# Altium PCB SPE_To_Ethernet.PcbDoc (part 2 of 3)
Units mm, origin at the board's own origin, x right, y up, seen from the top; angles counter-clockwise.
Board outline 152.4 x 101.6 mm, 4 copper layers (Top Layer, GND, Power, Bottom Layer), stack 1.526 mm thick; 154 components, 131 nets, 628 pads, 232 vias.
Unrouted connection lines stored in the file: 149.
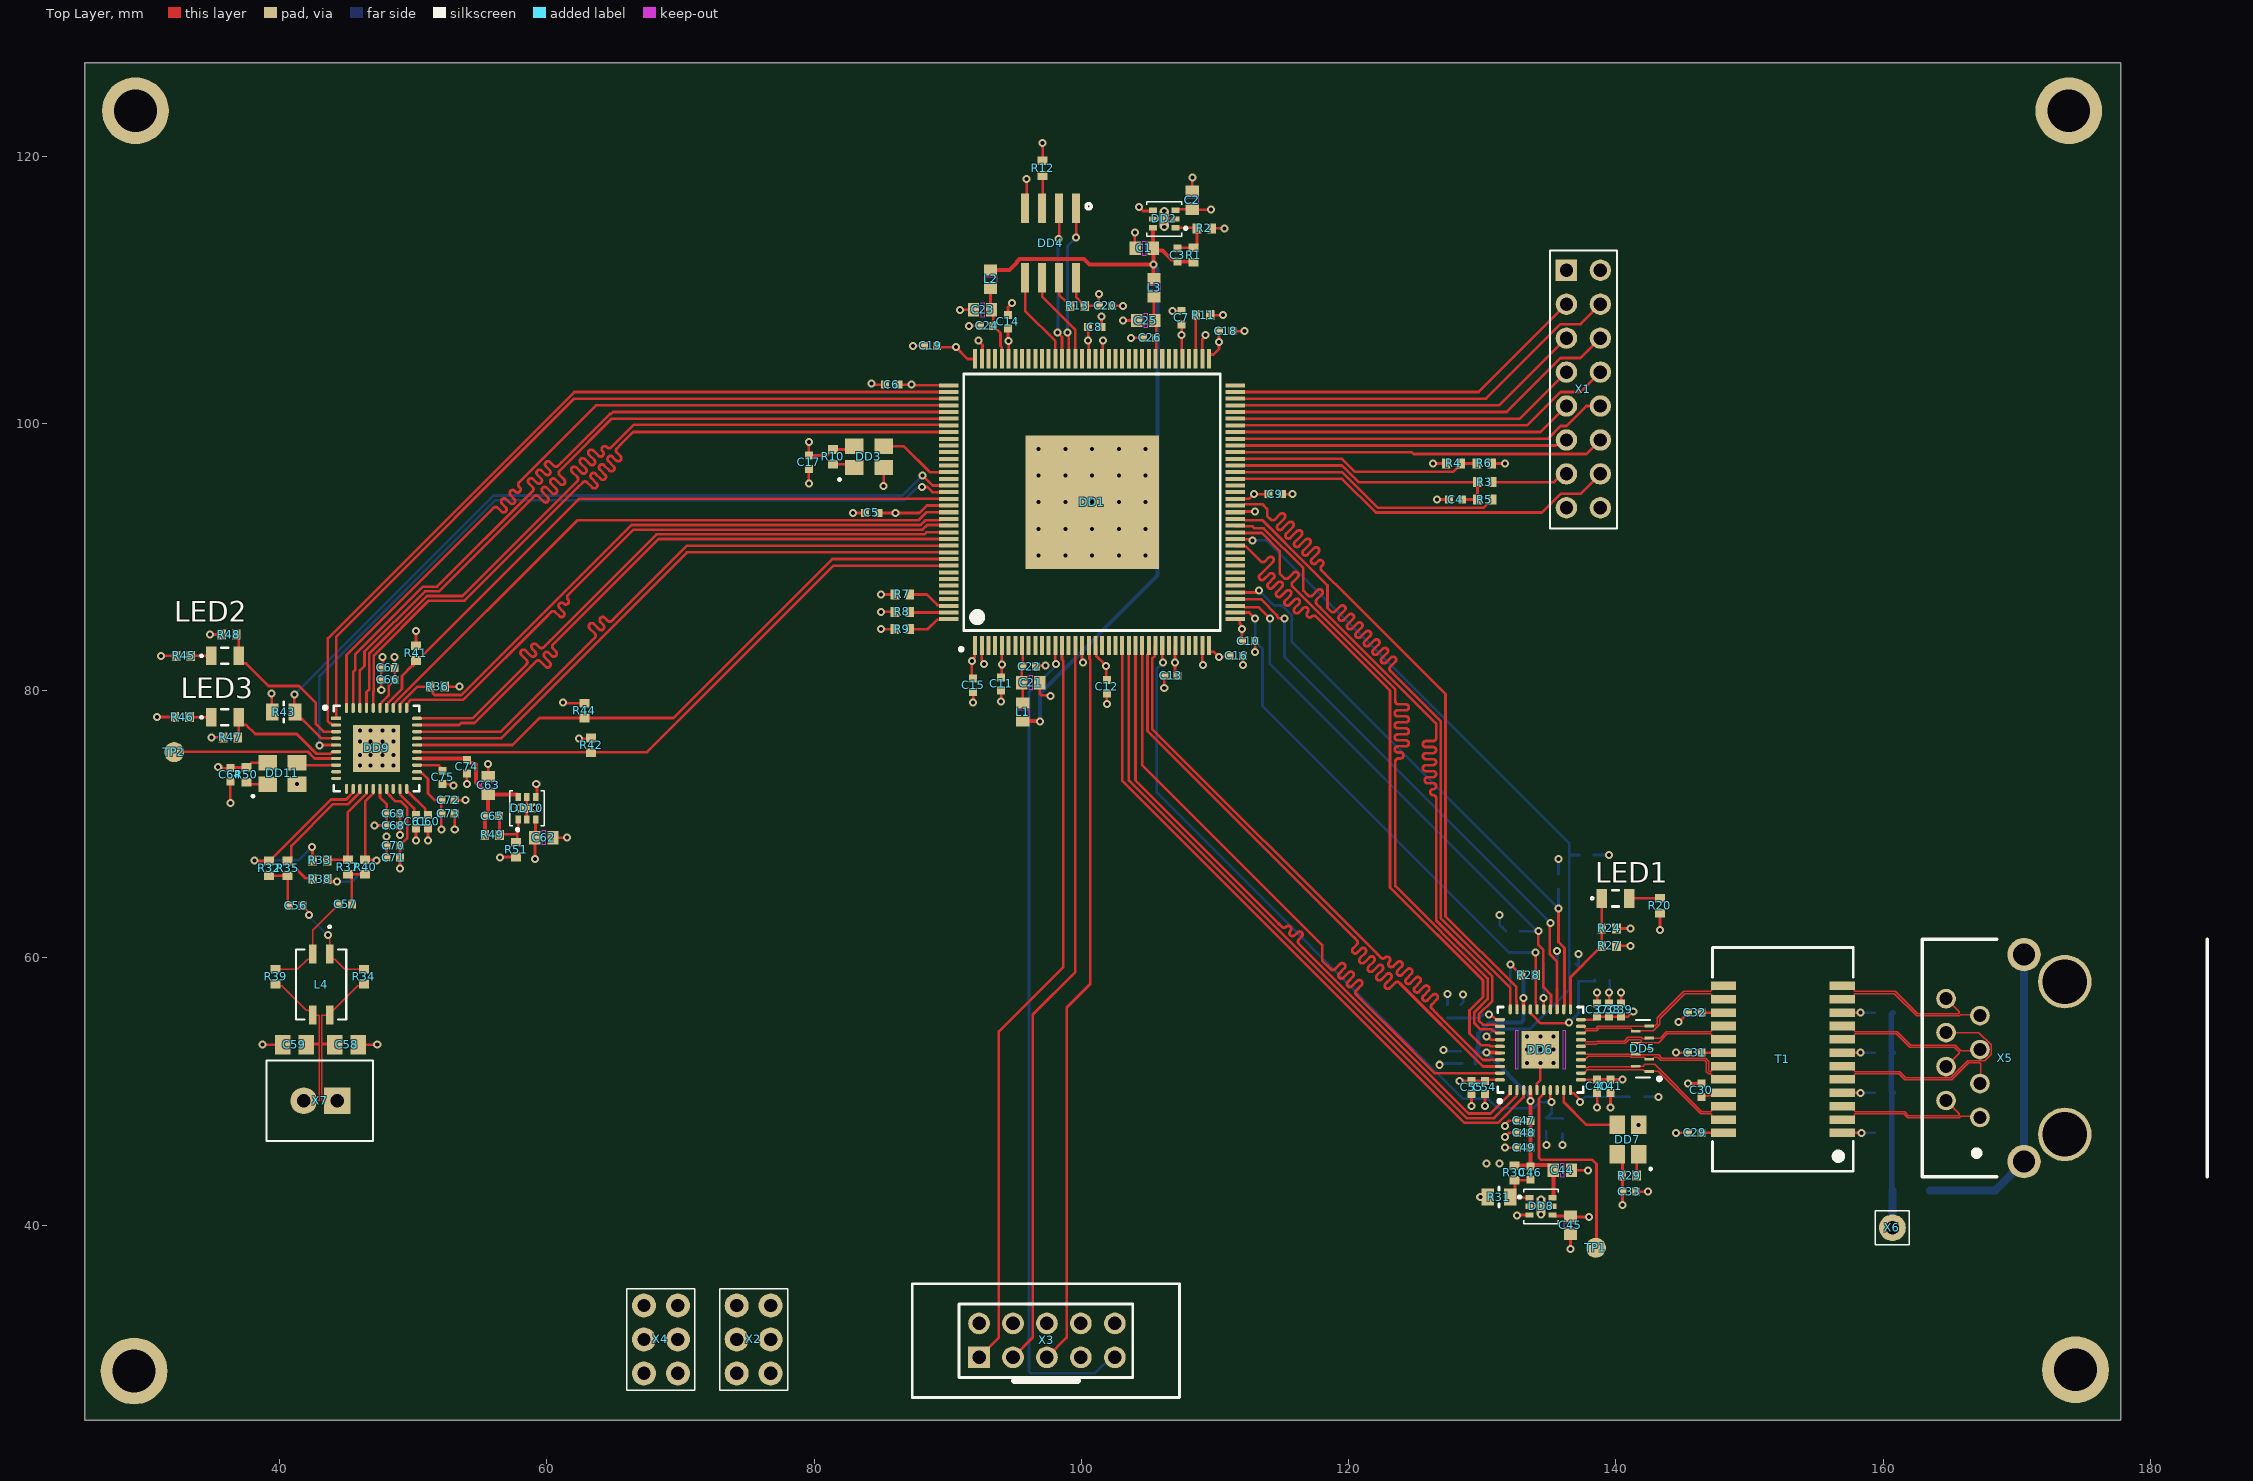
[diagram p0: Top Layer view]

## Via types
v1: diameter 0.6, hole 0.3, Top Layer to Bottom Layer, tented both sides, 207 vias
v2: diameter 0.7, hole 0.3, Top Layer to Bottom Layer, tented both sides, 25 vias

## Nets (pads, with @x,y where several pads share a name; then routed paths per layer and width w, separated by ;. In a path a pad name is that pad's centre, name@x,y a point inside that pad or via, vN(x,y) a via of type N, cw(c..) or ccw(c..) an arc to the next point about the centre after c; other vN are vias at no path point) (continued)
ETH_LINK_ST: (continued)
  Top Layer w0.2: DD1.38@111.525,85.85 112.55,85.85 v1(113,85.4) ; v1(134,60.4) R28.2@134,58.7 134,56.514 134.1,56.414 DD6.26@134.1,56.15
  Bottom Layer w0.2: v1(113,85.4) 113,83.678 113.55,83.128 113.55,78.85 132,60.4 v1(134,60.4)
ETH_MDC: DD1.40 DD6.23 | length 42.1
  Top Layer w0.2: DD1.40@111.525,86.85 113.428,86.85 114.65,85.628 114.65,85.533 114.767,85.416 115.184,85.416 v1(115.2,85.4) ; v1(135.1,62.6) 135.05,62.55 135.05,60.272 135.6,59.722 DD6.23@135.6,56.15
  Bottom Layer w0.2: v1(115.2,85.4) 115.2,82.5 v1(135.1,62.6)
ETH_MDIO: DD1.39 DD6.24 R15.2 | length 42.3
  Top Layer w0.2: DD1.39@111.525,86.35 112.1,86.35 112.2,86.25 113.25,86.25 v1(114.1,85.4) ; v1(134.2,62) 134.2,60.978 134.575,60.603 134.575,57.803 135.15,57.228 135.15,56.464 135.1,56.414 DD6.24@135.1,56.15
  Bottom Layer w0.2: v1(114.1,85.4) 114.1,82 v1@134.1,62 ; R15.2@132.85,62 v1@134.1,62 ; v1(134.2,62) v1@134.1,62
ETH_MDIX_MODE_3: DD6.27 R23.1 R26.2 | length 8.2
  Top Layer w0.2: DD6.27@133.6,56.15 133.6,55.886 133.725,55.761 133.725,55.745 134.37,55.1 136.446,55.1 v1(136.5,55.154)
  Bottom Layer w0.2: v1(136.5,55.154) 137.2,55.854 R23.1@137.2,58.25 138.4,58.25 R26.2@138.45,58.3 R26.2@138.4,58.35
ETH_R\E\S\E\T\: C27.2 DD1.29 DD6.7 R18.1 | length 54.3
  Top Layer w0.2: DD1.29@106.05,83.375 106.05,82.15 v1(106.1,82.1) ; DD6.7@135.1,50.1 135.1,49.408 135.2,49.308 v1(135.2,49.2)
  Bottom Layer w0.2: v1(106.1,82.1) 105.65,81.65 105.65,72.372 128.572,49.45 130.428,49.45 131.128,48.75 133.828,48.75 134.278,49.2 v1(135.2,49.2) 135.2,48.4 C27.2@134.8,48 135.95,48 R18.1@136,47.95